# EAGLE board Wiring Components (EAGLE 7.6.0)

Size 56.82 x 53.33 mm. Coordinates in mm from the lower left corner, seen from the top.
Outline: 0,0 56.82,0 56.82,53.33 0,53.33 0,0
Copper layers (1*16): Top 0.035mm / dielectric 1.5mm / Bottom 0.035mm
Design rules "default": minimum track width 10mil, minimum drill 24mil, track to track 8mil, track to pad 8mil, pad to pad 8mil, via to via 8mil, smd to smd 8mil, copper to edge 40mil, drill to drill 8mil, minimum pad ring 10mil, minimum via ring 8mil, stop-mask expansion 4mil, vias tented up to drill 0mil, thermal gap 10mil

## Footprints (pad centres in the part's own frame; a part is rotated, then mirrored left to right if it is on the bottom)
DC-POWER = drill 0.889 pad 2.54 octagon: + 0,2.54; - 0,-2.54
C5B2.5 = drill 0.813 pad 1.6 octagon: 1 -2.54,0; 2 2.54,0
PIEZO-22MM = drill 1 pad 2.54: P$1 -5,0; P$2 5,0
0207/10 = drill 0.813 octagon: 1 -5.08,0; 2 5.08,0
TL1105 = drill 1 pad 1.676: 1 -2.25,3.25; 2 2.25,3.25; 3 -2.25,-3.25; 4 2.25,-3.25
DIL08 = drill 0.813 pad 1.27: 1 -3.81,-3.81; 2 -1.27,-3.81; 3 1.27,-3.81; 4 3.81,-3.81; 5 3.81,3.81; 6 1.27,3.81; 7 -1.27,3.81; 8 -3.81,3.81

## Placement (x,y rotation side)
BAT1  [DC-POWER]  5,264.08 0 top  (outside the outline)
C1  100nF  [C5B2.5]  5,238.68 0 top  (outside the outline)
PIEZO1  [PIEZO-22MM]  5,111.68 0 top  (outside the outline)
R1  1.5k‎Ω  [0207/10]  5,124.38 0 top  (outside the outline)
R2  1.3k‎Ω  [0207/10]  5,137.08 0 top  (outside the outline)
R3  620‎Ω  [0207/10]  5,149.78 0 top  (outside the outline)
R4  1.1k‎Ω  [0207/10]  5,162.48 0 top  (outside the outline)
R5  1k‎Ω  [0207/10]  5,175.18 0 top  (outside the outline)
R6  910‎Ω  [0207/10]  5,187.88 0 top  (outside the outline)
R7  390‎Ω  [0207/10]  5,200.58 0 top  (outside the outline)
R9  6.2k‎Ω  [0207/10]  5,251.38 0 top  (outside the outline)
RA  1k‎Ω  [0207/10]  5,213.28 0 top  (outside the outline)
S1  [TL1105]  5,10.08 0 top
S2  [TL1105]  5,22.78 0 top
S3  [TL1105]  5,35.48 0 top
S4  [TL1105]  5,48.18 0 top
S5  [TL1105]  5,60.88 0 top  (outside the outline)
S6  [TL1105]  5,73.58 0 top  (outside the outline)
S7  [TL1105]  5,86.28 0 top  (outside the outline)
S8  [TL1105]  5,98.98 0 top  (outside the outline)
U1  [DIL08]  5,225.98 0 top  (outside the outline)

## Library data of the parts
BAT1 C1 PIEZO1 R1-R7 R9 RA S1-S8 U1 = AUTODESK_CIRCUITS_BREADBOARD

## Nets
N$1: S1.1
N$2: S1.4
N$3: R1.1 S1.2
N$4: R1.2 R2.1 S2.2
N$5: S2.1
N$6: S2.4
N$7: R2.2 R3.1 S3.2
N$8: S3.1
N$9: S3.4
N$10: S4.1
N$11: S4.4
N$12: R3.2 R4.1 S4.2
N$13: S5.1
N$14: S5.4
N$15: R4.2 R5.1 S5.2
N$16: S6.1
N$17: S6.4
N$18: R5.2 R6.1 S6.2
N$19: S7.1
N$20: S7.4
N$21: R6.2 R7.1 S7.2
N$22: S8.1
N$23: S8.4
N$24: R9.2 RA.2 U1.7
N$25: R7.2 R9.1 S8.2
N$26: C1.2 S1.3 S2.3 S3.3 S4.3 S5.3 S6.3 S7.3 S8.3 U1.2 U1.6
N$27: U1.5
N$28: BAT1.+ RA.1 U1.4 U1.8
N$29: PIEZO1.P$1 U1.3
N$30: BAT1.- C1.1 PIEZO1.P$2 U1.1

## Tracks (layer width: path | path; a pad name or v marks a point on that pad's centre or on a via)
N$3  (1 unrouted)
N$4  (2 unrouted)
N$7  (2 unrouted)
N$12  (2 unrouted)
N$15  (2 unrouted)
N$18  (2 unrouted)
N$21  (2 unrouted)
N$24  (2 unrouted)
N$25  (2 unrouted)
N$26  (10 unrouted)
N$28  (3 unrouted)
N$29  (1 unrouted)
N$30  (3 unrouted)